# EAGLE board HOMADOS (EAGLE 7.7.0)
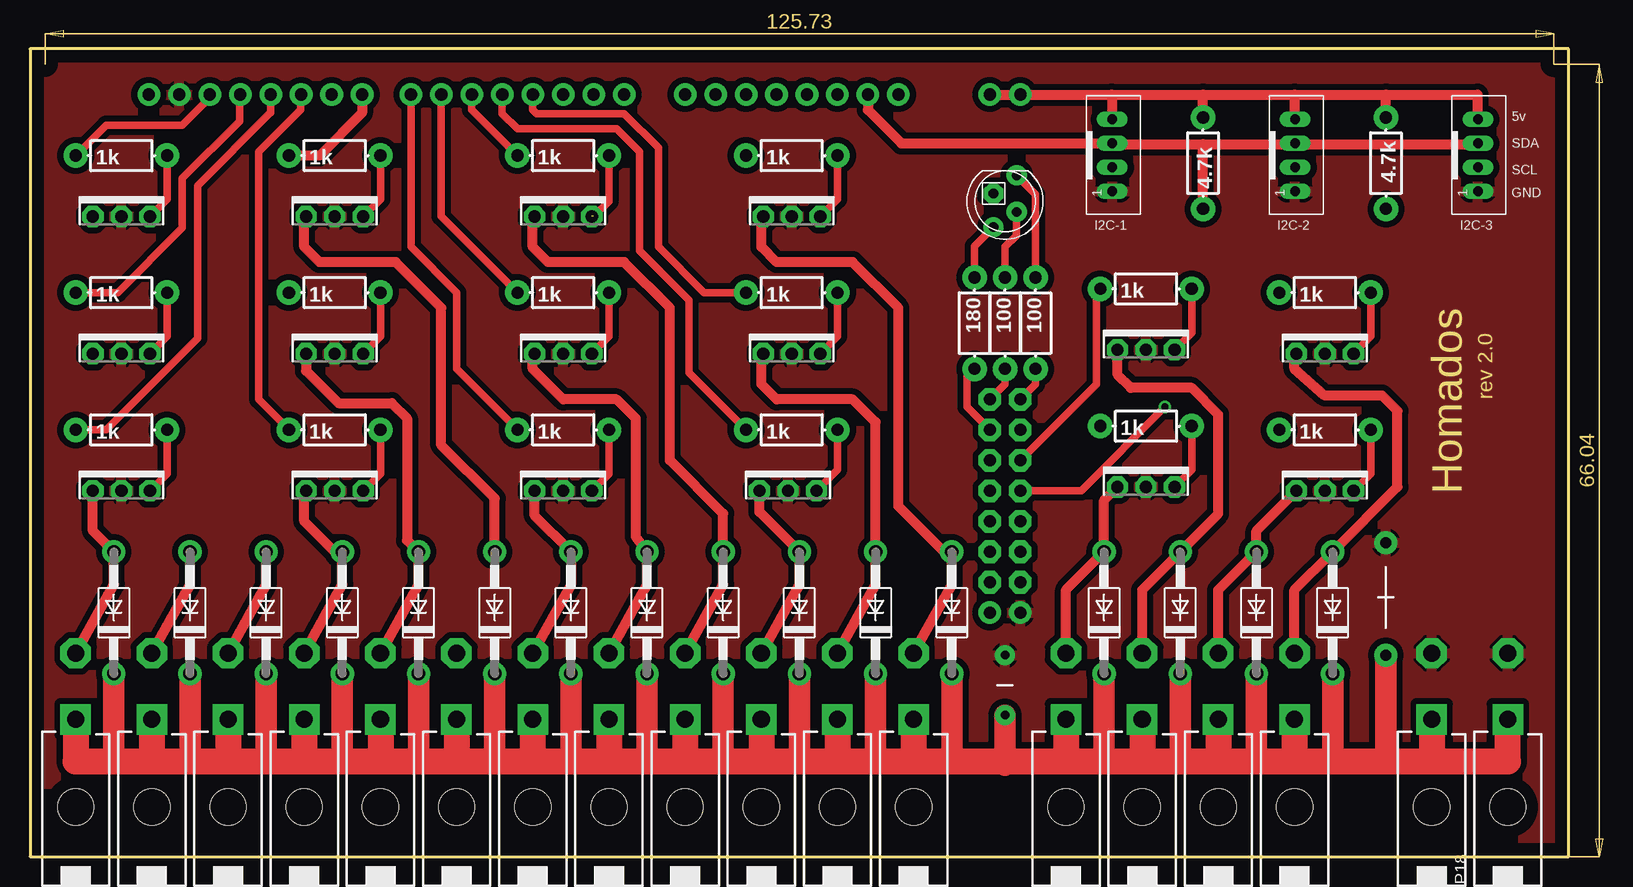
[diagram p0: board, top side]
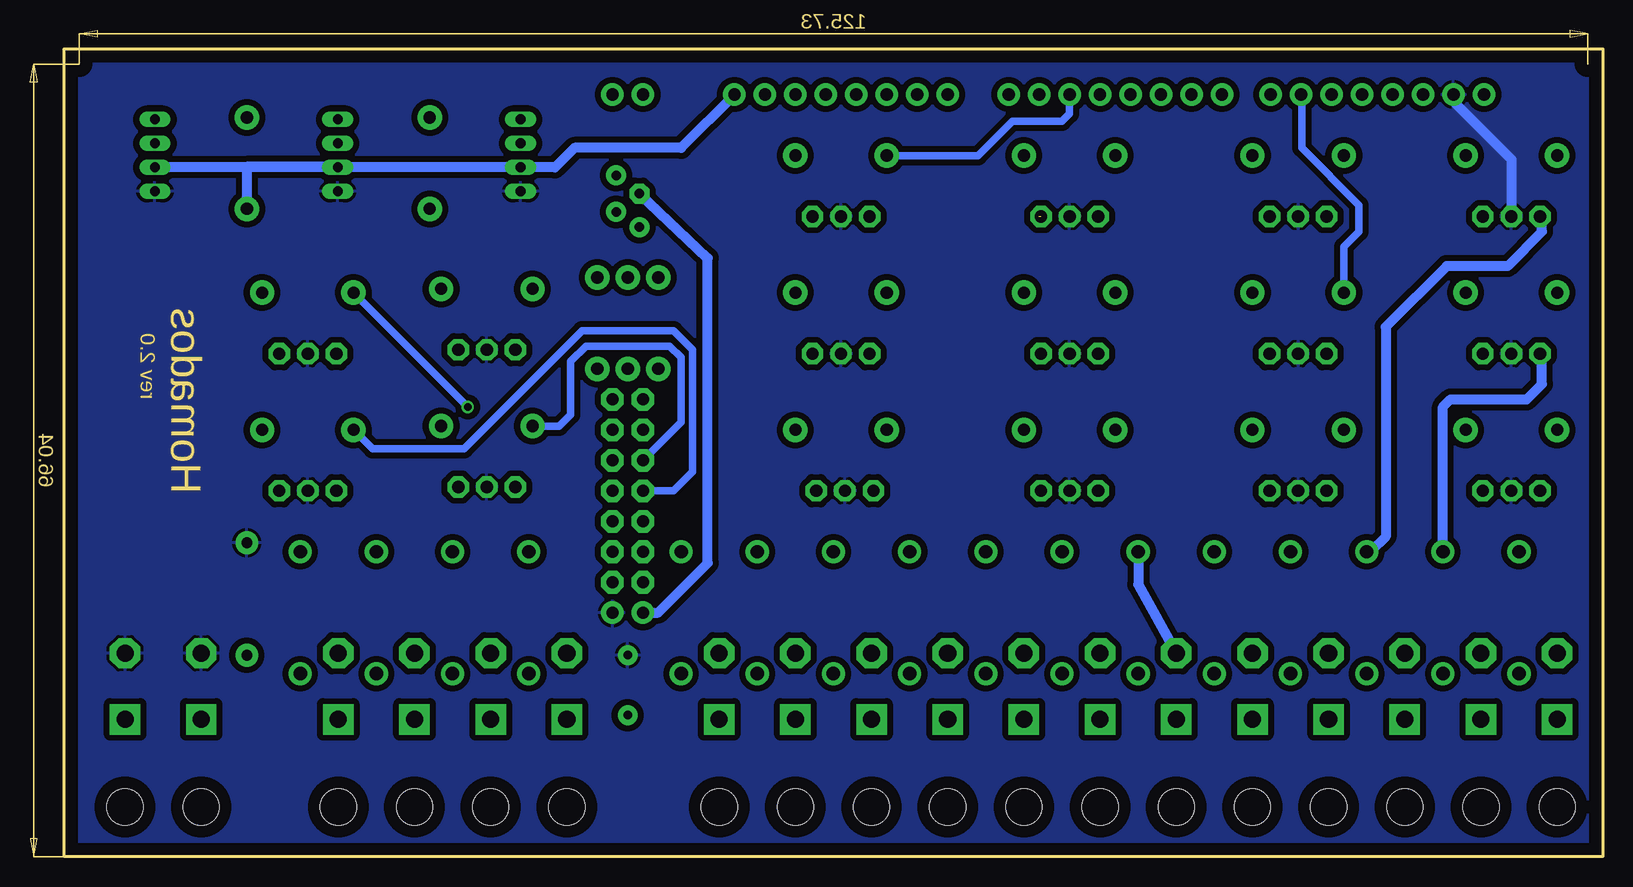
[diagram p1: board, bottom side, seen from below]

Size 128.27 x 67.31 mm. Coordinates in mm from the lower left corner, seen from the top.
Outline: 0,0 128.27,0 128.27,67.31 0,67.31 0,0
Copper layers (1*16): Top 0.035mm / dielectric 1.5mm / Bottom 0.035mm
Design rules "default": minimum track width 10mil, minimum drill 24mil, track to track 8mil, track to pad 8mil, pad to pad 8mil, via to via 8mil, smd to smd 8mil, copper to edge 40mil, drill to drill 8mil, minimum pad ring 10mil, minimum via ring 8mil, stop-mask expansion 4mil, vias tented up to drill 0mil, thermal gap 10mil
Net classes: 0 default: width 0.762 mm, drill 0.762 mm, clearance 0.508 mm; 1 PWR: width 1.016 mm, drill 0.762 mm, clearance 0.508 mm; 2 GND: width 1.016 mm, drill 0.762 mm, clearance 0.508 mm

## Footprints (pad centres in the part's own frame; a part is rotated, then mirrored left to right if it is on the bottom)
CAP-PTH-5MM = drill 0.7 pad 1.651: 1 -2.5,0; 2 2.5,0
CAP-PTH-LARGE = drill 0.9 pad 1.905: 1 -4.826,0; 2 4.572,0
DO41-10 = drill 1.118 pad 1.93: A 5.08,0; C -5.08,0
JST_B4B-PH_HEADER = drill 0.8 long: P1 2.98,0.048; P2 0.98,0.048; P3 -1.02,0.048; P4 -3.02,0.048
39-30-?02? = drill 1.422 pad 2.54 square: 1 0,0 | drill 1.422 pad 2.54 octagon: 2 0,5.512 | hole 3: 0,-7.3
TO225AAV = drill 1.016 pad 1.778 octagon: 1 -2.381,0; 2 0,0; 3 2.381,0
AXIAL-0.3-KIT = drill 1.016 pad 2.032: P$1 -3.81,0; P$2 3.81,0
ARDUINO_MEGA-PRO-5V = drill 1.016 pad 1.88: 0 -31.75,3.81; 1 -34.29,3.81; 2 -36.83,3.81; 3 -39.37,3.81; 4 -41.91,3.81; 5 -44.45,3.81; 5V@1 -1.27,3.81; 5V@2 1.27,3.81; 6 -46.99,3.81; 7 -49.53,3.81; 8 -53.594,3.81; 9 -56.134,3.81; 10 -58.674,3.81; 11 -61.214,3.81; 12 -63.754,3.81; 13 -66.294,3.81; 14 -26.67,3.81; 15 -24.13,3.81; 16 -21.59,3.81; 17 -19.05,3.81; 18 -16.51,3.81; 19 -13.97,3.81; 20 -11.43,3.81; 21 -8.89,3.81; AREF -71.374,3.81; GND@2 -1.27,-39.37; GND@3 1.27,-39.37; GND@4 -68.834,3.81 | drill 1.016 pad 1.88 octagon: 22 -1.27,-21.59; 23 1.27,-21.59; 42 -1.27,-24.13; 43 1.27,-24.13; 44 -1.27,-26.67; 45 1.27,-26.67; 46 -1.27,-29.21; 47 1.27,-29.21; 48 -1.27,-31.75; 49 1.27,-31.75; 50 -1.27,-34.29; 51 1.27,-34.29; 52 -1.27,-36.83; 53 1.27,-36.83
LED5MMRGB = drill 0.8 pad 1.676: 1 -2.159,0.968; 3 0.889,0.968; 4 2.159,-0.968 | drill 0.8 pad 1.676 octagon: 2 -0.635,-0.968

## Placement (x,y rotation side)
C1  [CAP-PTH-5MM]  81.28,14.29 90 top
C2  [CAP-PTH-LARGE]  113.03,21.59 90 top
D1  1N4004  [DO41-10]  51.44,20.32 90 top
D2  1N4004  [DO41-10]  57.78,20.32 90 top
D3  1N4004  [DO41-10]  45.09,20.32 90 top
D4  1N4004  [DO41-10]  38.73,20.32 90 top
D5  1N4004  [DO41-10]  32.38,20.32 90 top
D6  1N4004  [DO41-10]  26.04,20.32 90 top
D7  1N4004  [DO41-10]  19.68,20.32 90 top
D8  1N4004  [DO41-10]  13.34,20.32 90 top
D9  1N4004  [DO41-10]  6.99,20.32 90 top
D10  1N4004  [DO41-10]  64.14,20.32 90 top
D11  1N4004  [DO41-10]  70.48,20.32 90 top
D12  1N4004  [DO41-10]  76.83,20.32 90 top
D13  1N4004  [DO41-10]  108.58,20.32 90 top
D14  1N4004  [DO41-10]  102.23,20.32 90 top
D15  1N4004  [DO41-10]  95.89,20.32 90 top
D16  1N4004  [DO41-10]  89.53,20.32 90 top
I2C-1  JST-PH_4-PIN_HEADER  [JST_B4B-PH_HEADER]  90.17,58.42 270 top
I2C-2  JST-PH_4-PIN_HEADER  [JST_B4B-PH_HEADER]  105.41,58.42 270 top
I2C-3  JST-PH_4-PIN_HEADER  [JST_B4B-PH_HEADER]  120.65,58.42 270 top
P1  39-30-02?  [39-30-?02?]  48.26,11.43 0 top
P2  39-30-02?  [39-30-?02?]  116.84,11.43 0 top
P3  39-30-02?  [39-30-?02?]  54.61,11.43 0 top
P4  39-30-02?  [39-30-?02?]  41.91,11.43 0 top
P5  39-30-02?  [39-30-?02?]  35.56,11.43 0 top
P6  39-30-02?  [39-30-?02?]  29.21,11.43 0 top
P7  39-30-02?  [39-30-?02?]  22.86,11.43 0 top
P8  39-30-02?  [39-30-?02?]  16.51,11.43 0 top
P9  39-30-02?  [39-30-?02?]  10.16,11.43 0 top
P10  39-30-02?  [39-30-?02?]  3.81,11.43 0 top
P11  39-30-02?  [39-30-?02?]  60.96,11.43 0 top
P12  39-30-02?  [39-30-?02?]  67.31,11.43 0 top
P13  39-30-02?  [39-30-?02?]  73.66,11.43 0 top
P14  39-30-02?  [39-30-?02?]  105.41,11.43 0 top
P15  39-30-02?  [39-30-?02?]  99.06,11.43 0 top
P16  39-30-02?  [39-30-?02?]  92.71,11.43 0 top
P17  39-30-02?  [39-30-?02?]  86.36,11.43 0 top
P18  39-30-02?  [39-30-?02?]  123.19,11.43 0 top
Q1  T460  [TO225AAV]  44.45,53.34 0 top
Q2  T460  [TO225AAV]  44.45,41.91 0 top
Q3  T460  [TO225AAV]  44.45,30.48 0 top
Q4  T460  [TO225AAV]  25.4,53.34 0 top
Q5  T460  [TO225AAV]  7.62,41.91 0 top
Q6  T460  [TO225AAV]  7.62,53.34 0 top
Q7  T460  [TO225AAV]  25.4,30.48 0 top
Q8  T460  [TO225AAV]  25.4,41.91 0 top
Q9  T460  [TO225AAV]  63.5,53.34 0 top
Q10  T460  [TO225AAV]  63.5,41.91 0 top
Q11  T460  [TO225AAV]  63.18,30.48 0 top
Q12  T460  [TO225AAV]  7.62,30.48 0 top
Q13  T460  [TO225AAV]  93.03,30.8 0 top
Q14  T460  [TO225AAV]  93.03,42.23 0 top
Q15  T460  [TO225AAV]  107.95,30.48 0 top
Q16  T460  [TO225AAV]  107.95,41.91 0 top
R1  4.7k  [AXIAL-0.3-KIT]  97.79,57.78 90 top
R2  4.7k  [AXIAL-0.3-KIT]  113.03,57.78 270 top
R3  180  [AXIAL-0.3-KIT]  78.74,44.45 270 top
R4  1k  [AXIAL-0.3-KIT]  44.45,46.99 0 top
R5  1k  [AXIAL-0.3-KIT]  44.45,35.56 0 top
R6  1k  [AXIAL-0.3-KIT]  25.4,58.42 0 top
R7  1k  [AXIAL-0.3-KIT]  25.4,46.99 0 top
R8  1k  [AXIAL-0.3-KIT]  25.4,35.56 0 top
R9  1k  [AXIAL-0.3-KIT]  7.62,58.42 0 top
R10  1k  [AXIAL-0.3-KIT]  7.62,46.99 0 top
R11  1k  [AXIAL-0.3-KIT]  7.62,35.56 0 top
R12  1k  [AXIAL-0.3-KIT]  63.5,35.56 0 top
R13  1k  [AXIAL-0.3-KIT]  63.5,46.99 0 top
R14  1k  [AXIAL-0.3-KIT]  63.5,58.42 0 top
R15  1k  [AXIAL-0.3-KIT]  107.95,46.99 0 top
R16  1k  [AXIAL-0.3-KIT]  107.95,35.56 0 top
R17  1k  [AXIAL-0.3-KIT]  93.03,47.31 0 top
R18  1k  [AXIAL-0.3-KIT]  93.03,35.88 0 top
R19  1k  [AXIAL-0.3-KIT]  44.45,58.42 0 top
R20  100  [AXIAL-0.3-KIT]  83.82,44.45 270 top
R21  100  [AXIAL-0.3-KIT]  81.28,44.45 270 top
U2  ARDUINO-MEGAPRO-5V  [ARDUINO_MEGA-PRO-5V]  81.28,59.69 0 top
U$2  RGBLED_CA  [LED5MMRGB]  81.28,54.61 270 top

## Library data of the parts
C1 C2 R1-R21 = SparkFun-Passives
D1-D16 U$2 = adafruit
I2C-1-I2C-3 = JST_connectors
P1-P18 = con-molex-mini-fit
Q1-Q16 = transistor-npn
U2 = SparkFun-Minimal-Shields

## Nets
5V: I2C-1.P4 I2C-2.P4 I2C-3.P4 R1.P$2 R2.P$1 U2.5V@1 U2.5V@2
A0: R3.P$1 U$2.4
A2: R20.P$1 U$2.1
ARDUINO_GND: U2.GND@2 U$2.2
BLUE: R3.P$2 U2.42
D0: R15.P$1 U2.47
GND: C1.2 C2.2 I2C-1.P1 I2C-2.P1 I2C-3.P1 P2.2 P18.2 Q1.2 Q2.2 Q3.2 Q4.2 Q5.2 Q6.2 Q7.2 Q8.2 Q9.2 Q10.2 Q11.2 Q12.2 Q13.2 Q14.2 Q15.2 Q16.2 U2.GND@3 U2.GND@4
GREEN: R21.P$2 U2.22
N23: U2.51
N24: U2.52
N25: U2.53
N$1: R21.P$1 U$2.3
N$2: D2.A P3.2 Q1.1
N$3: U2.14
N$4: D1.A P1.2 Q2.1
N$6: Q1.3 R19.P$2
N$7: U2.15
N$8: U2.16
N$9: U2.17
N$10: Q2.3 R4.P$2
N$11: D3.A P4.2 Q3.1
N$12: U2.18
N$13: U2.19
N$14: Q3.3 R5.P$2
N$15: D4.A P5.2 Q4.1
N$17: U2.43
N$18: Q4.3 R6.P$2
N$19: D5.A P6.2 Q8.1
N$22: Q8.3 R7.P$2
N$23: D6.A P7.2 Q7.1
N$26: Q7.3 R8.P$2
N$27: D7.A P8.2 Q6.1
N$28: U2.48
N$29: U2.49
N$30: Q6.3 R9.P$2
N$31: D8.A P9.2 Q5.1
N$32: U2.50
N$34: Q5.3 R10.P$2
N$35: D9.A P10.2 Q12.1
N$38: Q12.3 R11.P$2
N$39: D10.A P11.2 Q11.1
N$42: Q11.3 R12.P$2
N$43: D11.A P12.2 Q10.1
N$46: Q10.3 R13.P$2
N$47: D12.A P13.2 Q9.1
N$50: Q9.3 R14.P$2
N$51: D13.A P14.2 Q16.1
N$54: Q16.3 R15.P$2
N$55: D14.A P15.2 Q15.1
N$58: Q15.3 R16.P$2
N$59: D15.A P16.2 Q14.1
N$62: Q14.3 R17.P$2
N$63: D16.A P17.2 Q13.1
N$66: Q13.3 R18.P$2
PW0: R14.P$1 U2.2
PW1: R13.P$1 U2.3
PW2: R12.P$1 U2.4
PW3: R19.P$1 U2.5
PW4: R4.P$1 U2.6
PW5: R5.P$1 U2.7
PW6: R6.P$1 U2.8
PW7: R7.P$1 U2.9
PW8: R8.P$1 U2.10
PW9: R11.P$1 U2.11
PW10: R10.P$1 U2.12
PW11: R9.P$1 U2.13
PW12: R18.P$1 U2.44
PW13: R17.P$1 U2.45
PW14: R16.P$1 U2.46
PWR: C1.1 C2.1 D1.C D2.C D3.C D4.C D5.C D6.C D7.C D8.C D9.C D10.C D11.C D12.C D13.C D14.C D15.C D16.C P1.1 P2.1 P3.1 P4.1 P5.1 P6.1 P7.1 P8.1 P9.1 P10.1 P11.1 P12.1 P13.1 P14.1 P15.1 P16.1 P17.1 P18.1
RED: R20.P$2 U2.23
SCL: I2C-1.P2 I2C-2.P2 I2C-3.P2 R2.P$2 U2.21
SDA: I2C-1.P3 I2C-2.P3 I2C-3.P3 R1.P$1 U2.20

## Tracks (layer width: path | path; a pad name or v marks a point on that pad's centre or on a via)
5V
  Top 0.813: U2.5V@1 U2.5V@2 90.17,63.5 | 90.17,63.5 97.79,63.5 | 97.79,63.5 105.41,63.5 | 105.41,63.5 113.03,63.5 | 113.03,63.5 120.65,63.5 120.65,61.49 I2C-3.P4 | R2.P$1 113.03,63.5 | I2C-2.P4 105.46,63.45 105.41,63.5 | R1.P$2 97.79,63.5 | I2C-1.P4 90.22,63.45 90.17,63.5
A0
  Top 0.61: R3.P$1 78.74,50.88 U$2.4
A2
  Top 0.61: R20.P$1 83.82,55.2 U$2.1
ARDUINO_GND
  Bottom 0.813: U2.GND@2 78.74,20.32 74.61,24.45 74.61,49.86 U$2.2
BLUE
  Top 0.61: U2.42 78.11,37.47 78.11,40.01 R3.P$2
D0  (via drill 0.6)
  Top 0.61: U2.47 87.63,30.48 v94.61,37.47
  Bottom 0.61: v94.61,37.47 R15.P$1
GND
  Bottom 0.813: U2.GND@4 12.45,62.93 7.62,58.1 Q6.2
  pour Top: 0,67.31 127.76,67.31 arc-90 128.27,66.8 128.27,0 0,-0.76
  pour Bottom: 0.32,66.99 128.27,67.31 128.27,0 0,0
GREEN
  Top 0.61: U2.22 81.28,39.37 R21.P$2
N$1
  Top 0.61: R21.P$1 81.28,50.8 82.23,51.75 82.23,53.7 U$2.3
N$2
  Top 0.813: P3.2 57.78,22.66 D2.A 57.78,28.57 53.34,33.02 53.34,45.72 49.53,49.53 43.18,49.53 41.91,50.8 41.91,53.18 Q1.1
N$4
  Top 0.813: P1.2 51.44,22.66 D1.A 50.48,26.67 50.48,36.51 48.9,38.1 44.45,38.1 41.91,40.64 41.91,41.75 Q2.1
N$6  (1 unrouted)
  Top 0.61: 46.99,53.34 48.26,54.61 R19.P$2
N$10
  Top 0.61: Q2.3 48.26,43.34 R4.P$2
N$11
  Top 0.813: P4.2 45.09,22.66 D3.A 42.07,28.42 Q3.1
N$14
  Top 0.61: Q3.3 48.26,31.91 R5.P$2
N$15
  Top 0.813: D4.A 38.73,29.84 34.29,34.29 34.29,45.72 30.48,49.53 24.13,49.53 22.86,50.8 22.86,53.18 Q4.1
  Bottom 0.813: D4.A 38.73,22.66 P5.2
N$18
  Top 0.61: Q4.3 29.21,54.77 R6.P$2
N$19
  Top 0.813: P6.2 32.38,22.66 D5.A 31.43,26.35 31.43,36.51 30.16,37.78 25.72,37.78 23.02,40.48 Q8.1
N$22
  Top 0.61: Q8.3 29.21,43.34 R7.P$2
N$23
  Top 0.813: P7.2 26.04,22.66 D6.A 25.4,25.4 22.86,27.94 22.86,30.32 Q7.1
N$26
  Top 0.61: Q7.3 29.21,31.91 R8.P$2
N$27
  Top 0.813: P8.2 19.68,22.66 D7.A
  Bottom 0.813: Q6.1 5.08,53.18 5.08,52.07 7.94,49.21 13.02,49.21 18.1,44.13 18.1,26.67 19.37,25.4 D7.A
N$30
  Top 0.61: Q6.3 11.43,54.77 R9.P$2
N$31
  Top 0.813: P9.2 13.34,22.66 D8.A
  Bottom 0.813: D8.A 13.34,37.47 12.7,38.1 6.35,38.1 5.08,39.37 5.08,41.75 Q5.1
N$34
  Top 0.61: Q5.3 11.43,43.34 R10.P$2
N$35
  Top 0.813: P10.2 6.99,22.66 D9.A 5.24,27.15 Q12.1
N$38
  Top 0.61: Q12.3 11.43,31.91 R11.P$2
N$39
  Top 0.813: P11.2 64.14,22.66 D10.A 60.8,28.73 Q11.1
N$42
  Top 0.61: Q11.3 67.31,32.23 R12.P$2
N$43
  Top 0.813: P12.2 70.48,22.66 D11.A 70.48,36.2 68.58,38.1 62.23,38.1 60.96,39.37 60.96,41.75 Q10.1
N$46
  Top 0.61: Q10.3 67.31,43.34 R13.P$2
N$47
  Top 0.813: P13.2 76.83,22.66 D12.A 76.2,25.4 72.39,29.21 72.39,45.72 68.58,49.53 62.23,49.53 60.96,50.8 60.96,53.18 Q9.1
N$50
  Top 0.61: Q9.3 67.31,54.77 R14.P$2
N$51
  Top 0.813: P14.2 105.41,22.23 D13.A 113.98,30.8 113.98,37.15 112.71,38.42 107.95,38.42 105.41,40.64 105.41,41.75 Q16.1
N$54
  Top 0.61: Q16.3 111.76,43.34 R15.P$2
N$55
  Top 0.813: Q15.1 102.23,27.15 D14.A 99.06,22.23 P15.2
N$58
  Top 0.61: Q15.3 111.76,31.91 R16.P$2
N$59
  Top 0.813: P16.2 92.71,22.23 D15.A 99.06,28.57 99.06,36.83 96.84,39.05 91.76,39.05 90.65,40.16 Q14.1
N$62
  Top 0.61: Q14.3 96.84,43.66 R17.P$2
N$63
  Top 0.813: P17.2 86.36,22.23 D16.A 89.53,29.69 Q13.1
N$66
  Top 0.61: Q13.3 96.84,32.23 R18.P$2
PW0
  Bottom 0.61: U2.2 44.45,61.91 45.09,61.28 49.21,61.28 52.07,58.42 R14.P$1
PW1
  Top 0.61: U2.3 41.91,62.23 42.23,61.91 49.53,61.91 52.39,59.05 52.39,50.8 56.2,46.99 R13.P$1
PW2
  Top 0.61: U2.4 39.37,61.91 40.64,60.64 48.9,60.64 50.8,58.74 50.8,50.48 54.93,46.35 54.93,40.32 R12.P$1
PW3
  Top 0.61: U2.5 36.83,62.23 R19.P$1
PW4
  Top 0.61: U2.6 34.29,53.34 R4.P$1
PW5
  Top 0.61: U2.7 31.75,50.8 35.56,46.99 35.56,40.64 R5.P$1
PW6
  Top 0.813: U2.8 27.69,61.98 24.13,58.42 R6.P$1
PW7
  Bottom 0.61: R7.P$1 21.59,50.8 20.32,52.07 20.32,54.29 25.08,59.05 25.08,63.44 U2.9
PW8
  Top 0.61: U2.10 22.54,63.5 22.54,62.23 19.05,58.74 19.05,38.1 R8.P$1
PW9
  Top 0.61: U2.11 20.07,61.98 20,61.92 13.97,55.9 13.97,43.18 6.35,35.56 R11.P$1
PW10
  Top 0.61: R10.P$1 7.3,46.99 12.7,52.39 12.7,56.52 17.46,61.28 17.46,63.44 U2.12
PW11
  Top 0.61: U2.13 14.99,63.25 12.7,60.96 6.35,60.96 R9.P$1
PW12
  Bottom 0.61: U2.44 76.83,36.2 76.83,41.59 77.79,42.55 84.77,42.55 86.04,41.27 86.04,36.83 87,35.88 R18.P$1
PW13
  Top 0.61: U2.45 88.9,39.37 88.9,46.99 R17.P$1
PW14
  Bottom 0.61: U2.46 77.47,30.48 75.88,32.07 75.88,42.23 77.47,43.81 85.09,43.81 94.93,33.97 102.55,33.97 R16.P$1
PWR
  Top 1.778: D9.C 6.99,7.94 | D8.C 13.34,7.94 | D7.C 19.68,7.94 | D6.C 26.04,7.94 | D5.C 32.38,7.94 | D4.C 38.73,7.94 | D3.C 45.09,7.94 | D1.C 51.44,7.94 | D2.C 57.78,7.94 | D10.C 64.14,7.94 | D11.C 70.48,7.94 | D16.C 89.53,7.94 | D15.C 95.89,7.94 | D14.C 102.23,7.94 | D13.C 108.58,7.94 | D12.C 76.83,7.94 | C2.1 113.03,7.94 | C1.1 81.28,7.94 81.28,7.62
  Top 2.184: P10.1 3.81,7.94 6.99,7.94 10.16,7.94 | 10.16,7.94 13.34,7.94 16.51,7.94 | 16.51,7.94 19.68,7.94 22.86,7.94 | 22.86,7.94 26.04,7.94 29.21,7.94 | 29.21,7.94 32.38,7.94 35.56,7.94 | 35.56,7.94 38.73,7.94 41.91,7.94 | 41.91,7.94 45.09,7.94 48.26,7.94 | 48.26,7.94 51.44,7.94 54.61,7.94 | 54.61,7.94 57.78,7.94 60.96,7.94 | 60.96,7.94 64.14,7.94 67.31,7.94 | 67.31,7.94 70.48,7.94 73.66,7.94 | 73.66,7.94 76.83,7.94 81.28,7.94 86.36,7.94 | 86.36,7.94 89.53,7.94 92.71,7.94 | 92.71,7.94 95.89,7.94 99.06,7.94 | 99.06,7.94 102.23,7.94 105.41,7.94 | 105.41,7.94 108.58,7.94 113.03,7.94 116.84,7.94 | 116.84,7.94 123.19,7.94 P18.1 | P9.1 10.16,7.94 | P8.1 16.51,7.94 | P7.1 22.86,7.94 | P6.1 29.21,7.94 | P5.1 35.56,7.94 | P4.1 41.91,7.94 | P1.1 48.26,7.94 | P3.1 54.61,7.94 | P11.1 60.96,7.94 | P12.1 67.31,7.94 | P13.1 73.66,7.94 | P17.1 86.36,7.94 | P16.1 92.71,7.94 | P15.1 99.06,7.94 | P14.1 105.41,7.94 | P2.1 116.84,7.94
RED
  Top 0.61: U2.23 83.82,39.37 R20.P$2
SCL
  Bottom 0.813: U2.21 76.83,59.05 85.72,59.05 87.34,57.44 I2C-1.P2 I2C-2.P2 | I2C-2.P2 I2C-3.P2 | I2C-2.P2 105.48,57.47 113.03,57.47 R2.P$2
SDA
  Top 0.813: U2.20 69.85,62.23 72.64,59.44 I2C-1.P3 90.28,59.37 97.79,59.37 | 97.79,59.37 105.41,59.37 104.84,59.44 I2C-2.P3 105.53,59.37 120.65,59.37 120.72,59.44 I2C-3.P3 | R1.P$1 97.79,59.37

## Text on the board
Dimension: Homados | rev 2.0
tNames: 5v | SDA | SCL | GND